# Altium PCB Wikiot-II.PcbDoc (part 2 of 2)
Units mil, origin at the board's own origin, x right, y up, seen from the top; angles counter-clockwise.
Board outline 3930 x 3935 mil, 2 copper layers (Top Layer, Bottom Layer); 209 components, 179 nets, 926 pads, 255 vias.
Unrouted connection lines stored in the file: 39.
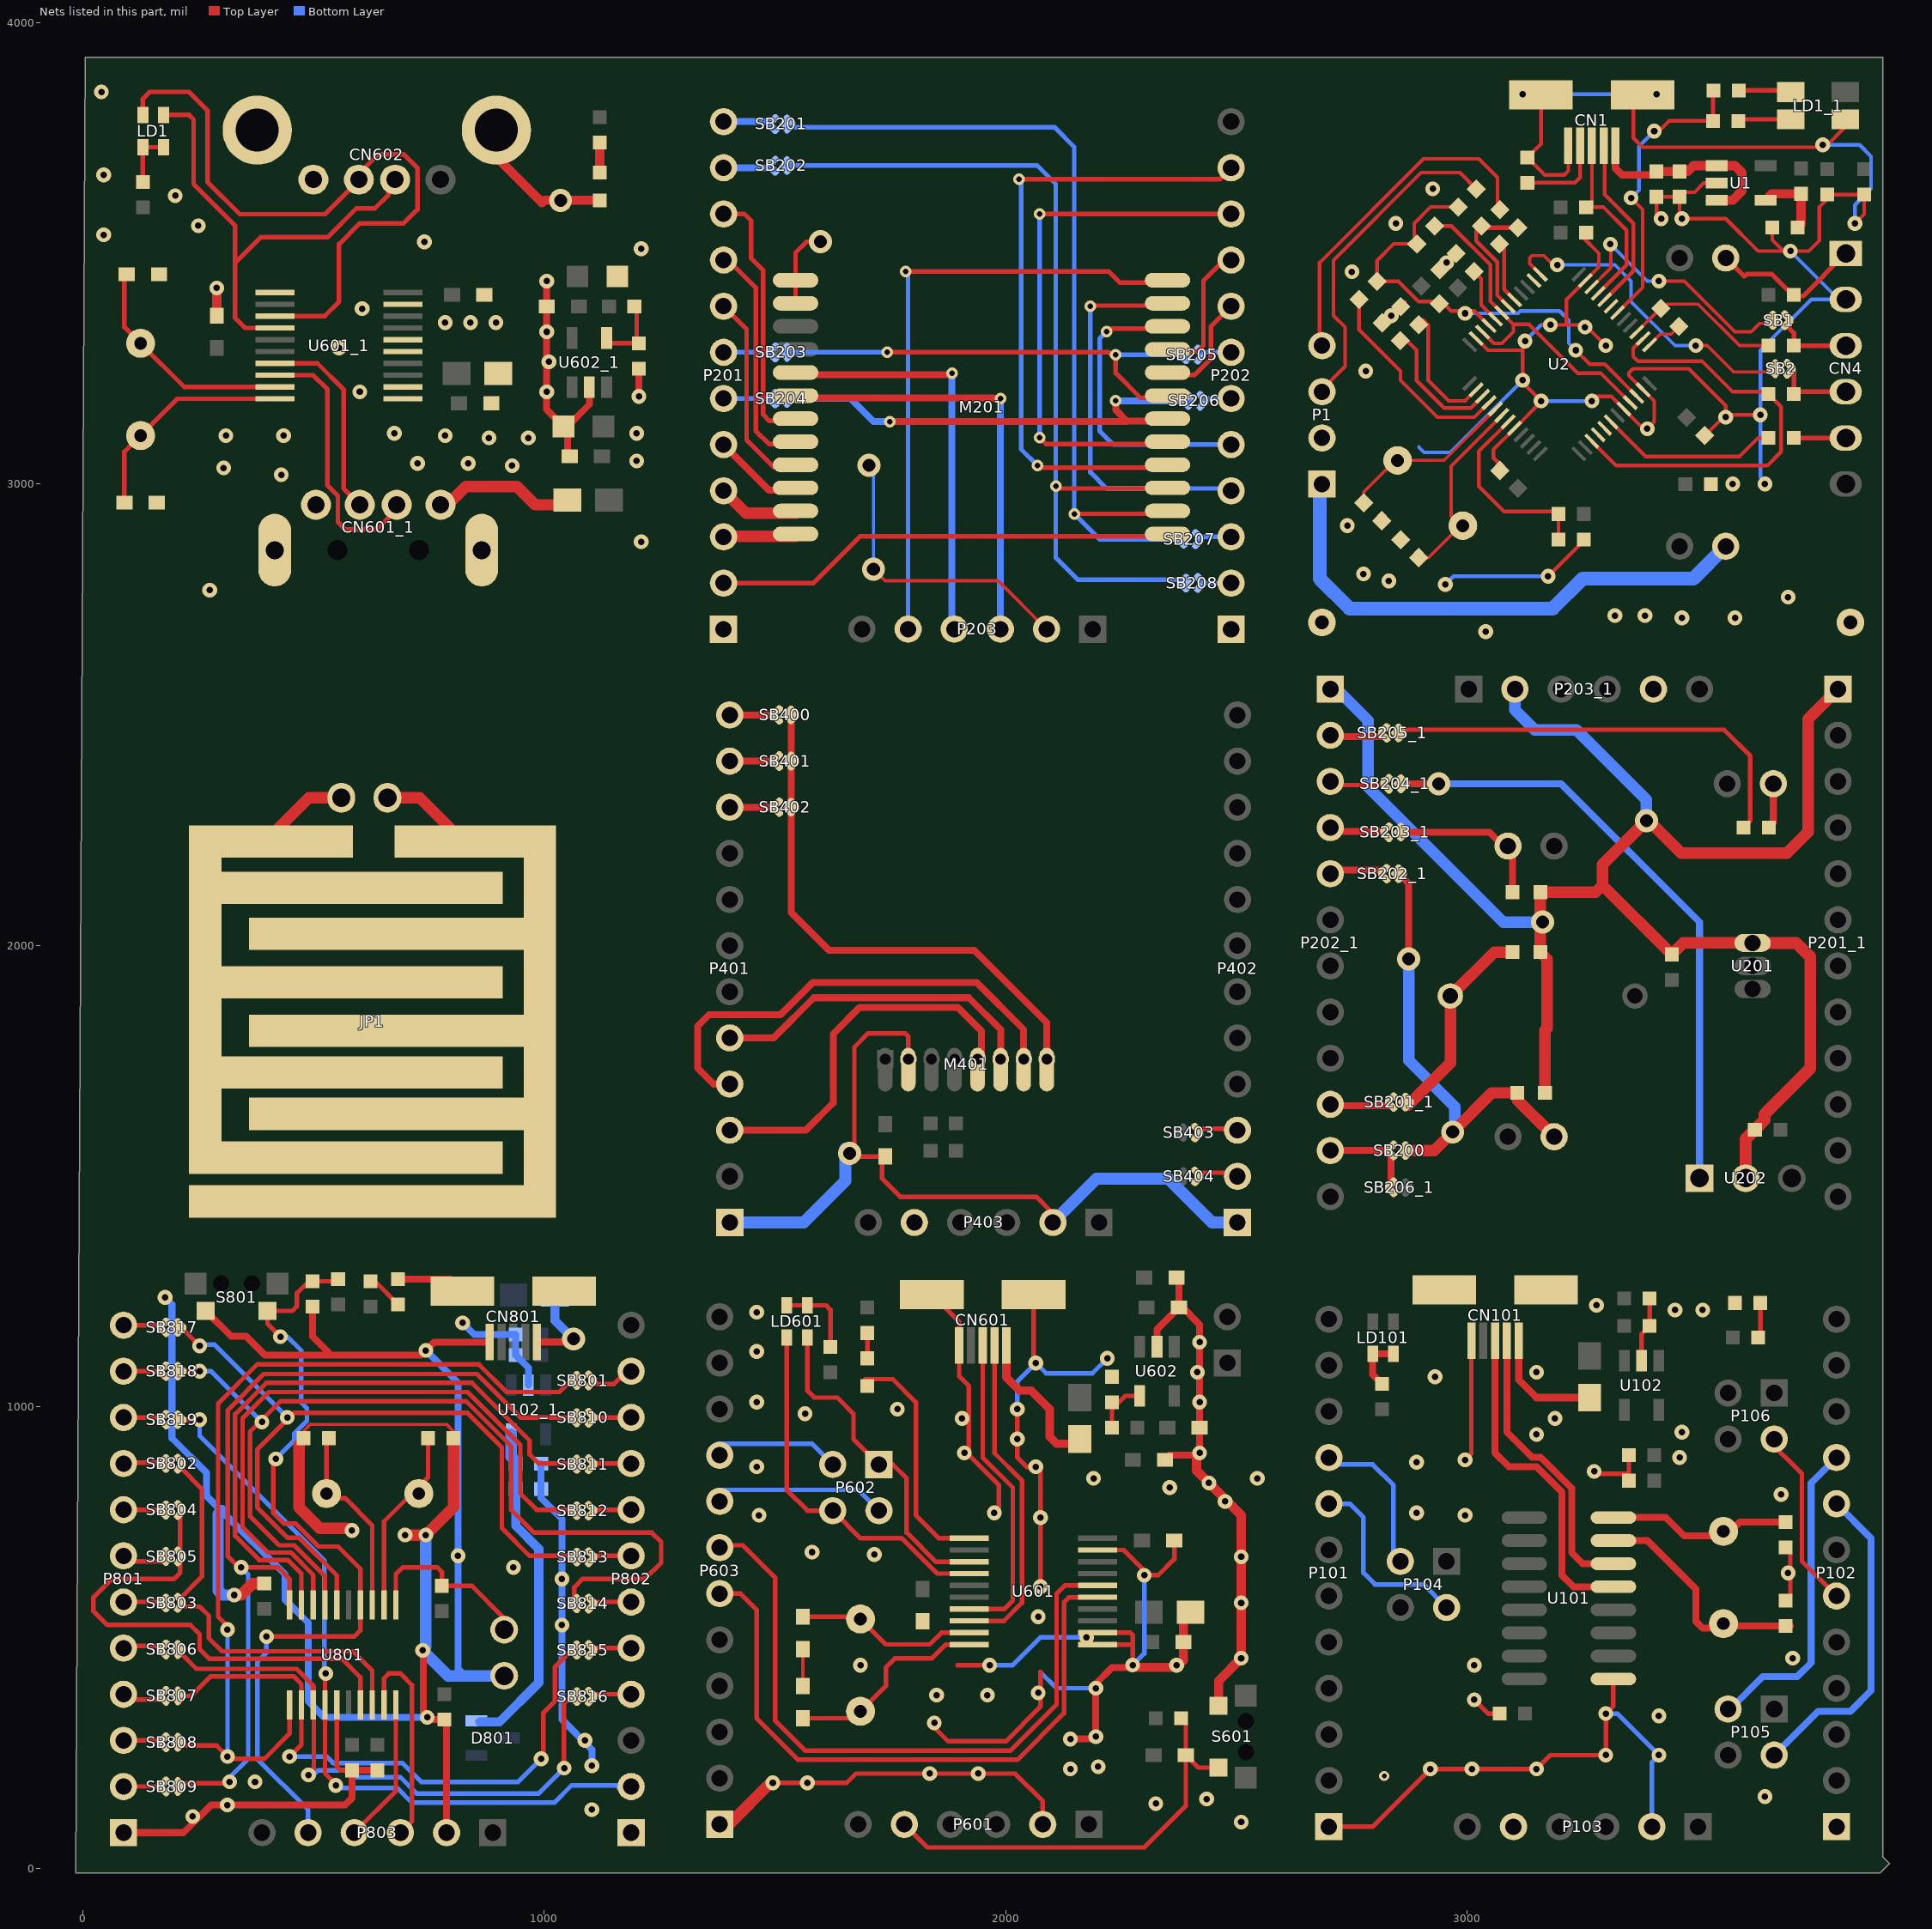
[diagram p2: the nets of this part, all layers, seen from the top]

## Via types
v1: diameter 32, hole 14, Top Layer to Bottom Layer, 220 vias
v2: diameter 50, hole 28, Top Layer to Bottom Layer, 18 vias
v3: diameter 25, hole 12, Top Layer to Bottom Layer, 15 vias
v4: diameter 22, hole 10, Top Layer to Bottom Layer, tented both sides, 1 vias
v5: diameter 32, hole 14, Top Layer to Bottom Layer, tented bottom, 1 vias

## Nets (pads, with @x,y where several pads share a name; then routed paths per layer and width w, separated by ;. In a path a pad name is that pad's centre, name@x,y a point inside that pad or via, vN(x,y) a via of type N, cw(c..) or ccw(c..) an arc to the next point about the centre after c; other vN are vias at no path point) (continued)
GND: C1.1 C2.1 C3.2 C4.1 C5.1 C6.1 C7.1 C8.2 C11.1 C12.1 C13.2 C100.1 C101.1 C102.1 C103.1 C111.1 C112.1 C113.1 C200.1 C201.1 C400.2 C601.1 C601_1.1 C602.2 C602_1.2 C603.1 C603_1.1 C604.1 C604_1.1 C605.1 C605_1.1 C606.1 C606_1.1 C608.1 C608_1.1 C609.1 C609_1.1 C610.1 C610_1.1 C611.1 C611_1.1 C800.1 C801.1 C802.2 C803.2 C804.2 C805.2 C806.2 C807.2 C808.1 C809.1 C810.1 CN1.0 CN1.5 CN4.2 CN101.0 CN101.5 CN601.0 CN601.5 CN601_1.0 CN601_1.4 CN602.0 CN602.4 CN801.0 CN801.5 D106.2 D800.2 JP801.1 LD1_1.1 M201.1 M201.2 M401.2 P1.2 P101.1 P102.1 P103.2 P201.1 P201_1.1 P202.1 P202_1.1 P203.2 P203_1.2 P401.1 P402.1 P403.2 P601.2 P603.1 P801.1 P802.1 P803.2 pad.2 R2.1 R3.1 R6.1 R9.2 R15.2 R29.1 R202.1 R204.1 R205.1 R601_1.1 R605.1 R605_1.1 S601.1 S801.1 U1.2 U2.8 U2.20 U2.23 U2.35 U2.47 U101.1 U102.2 U102_1.2 U201.1 U202.2 U601.11 U601.12 U601.19 U601_1.11 U601_1.12 U601_1.19 U602.2 U602_1.2 U801.15 | length 27097.6
  Top Layer w7: C803.2@478,932 478,947 493,962 788,962 803,947 C802.2@803,932 ; C606.1@1560,400 C605.1@1560,475 C605.1@1560,485 ; v2(1713.17,2815.46) 1738.17,2790.46 1983.17,2790.46 P203.2@2088.17,2685.46
  Top Layer w8: R2.1@2825.55,3354.45 R3.1@2865.55,3394.45 ; R6.1@2975.55,3504.45 R6.1@2980.55,3504.45 ; U2.47@3019.05,3315.68 3044.73,3290 3120,3290 ; C7.1@3070.55,3029.45 3070.55,3042.98 3056.55,3056.98 3056.55,3074.8 U2.8@3102.56,3120.81 3160,3178.24 v1(3160,3180) 3120,3220 v1(3120,3225) 3120,3290 ; v1@3130,3310 v1(3125,3310) 3120,3305 3120,3290 ; CN1.0@3159.7,3843.46 3159.7,3737.2 R15.2@3130,3707.5 3167.5,3670 3210,3670 3218.76,3678.76 CN1.5@3218.76,3733.14 ; v1@3165,3345 v1(3180,3345) 3215,3345 ; v1(3175,2800) 3252.5,2877.5 C6.1@3252.5,2880 ; C1.1@3250,3535 3285,3500 3285,3470.27 U2.35@3255.68,3440.95 3215,3400.27 3215,3345 ; v1(3270,3180) v1@3275,3180 ; v1@3275,3190 3311.76,3190 U2.20@3339.19,3162.56 3381.76,3120 v1(3390,3120) 3405,3135 3405,3180.27 U2.23@3380.95,3204.32 3350,3235.27 3350,3241 3359,3250 3480,3250 3560,3170 v1(3560,3145) ; v1(3300,3300) 3260,3340 v1(3255,3340) 3250,3345 3215,3345 ; CN1.0@3380.17,3843.46 3360,3823.28 3360,3750 3380,3730 3775,3730 3819.06,3774.06 LD1_1.1@3819.06,3790.47 ; v1(3420,3575) 3410,3585 C2.1@3410,3622.5 C5.1@3460,3622.5 3460,3580 v1(3465,3575) 3560,3575 3630,3505 v1@3685,3505 ; C5.1@3460,3632.5 3492.5,3632.5 3512.6,3652.6 U1.2@3540,3652.6 ; C11.1@3514.45,3105.55 3515.55,3105.55 3555,3145 v1(3560,3145) ; v1(3635,3150) 3565,3150 v1(3560,3145) ; R29.1@3661,3556 3661,3529 v1@3685,3505 ; v1@3707.5,3497.5 v1(3700,3505) ; v1(3840,3565) 3860,3585 C13.2@3860,3627.5 ; C13.2@3855,3627.5 3790,3627.5 3762.5,3600 3762.5,3527.5 3740,3505 v1(3700,3505) ; v1@3685,3505 v1(3700,3505)
  Top Layer w10: U801.15@550.2,353.73 550.2,219.8 558,212 C804.2@583,212 ; v1@1490,185 v1(1495,185) v1(1570,185) 1655,185 1675,205 v1(1835,205) v1(1940,205) 2020,205 2080,145 P601.2@2080,95 P601.2@2080,75 ; M201.2@1544.4,3391.76 M201.1@1544.4,3441.76 1544.4,3501.68 1568.17,3525.46 v2(1598.17,3525.46) ; M401.2@1788.72,1730.77 1788.72,1802.65 1781.83,1809.54 1701.83,1809.54 1671.83,1779.54 1671.83,1542.65 C400.2@1738.72,1542.65 1731.83,1535.76 1731.83,1494.54 1771.83,1454.54 2066.83,1454.54 2101.83,1419.54 P403.2@2101.83,1399.54 ; CN601.0@1839.7,1243.46 1898.76,1184.4 CN601.5@1898.76,1133.14 1898.76,1066.24 1920,1045 1920,895 1985,830 1985,770 v1(1975,770) ; v1@1850,325 1845,320 v1(1845,315) 1845,305 1875,275 2000,275 2075,350 2075,425 ; 1895,440 v1(1965,440) ; v1(2025,995) v1(2025,930) 2025,890 2045,870 v1(2065,870) 2075,860 v1(2075,760) v1(2075,610) v1@2075,605 ; CN601.0@2060.17,1243.46 2060.17,1099.83 v1(2065,1095) ; U601.11@2198.94,484.84 2274.84,484.84 ; U601.12@2198.94,510.43 2269.57,510.43 2274.84,505.16 2274.84,484.84 ; U601.19@2198.94,689.57 2255.43,689.57 2310,635 2330,635 2365,670 2365,705 C603.1@2365,710 ; v1(2274.84,440.16) 2274.84,484.84 ; C604.1@2390,490 C602.2@2390,540 ; P101.1@2700,90 2795,90 v1(2920,215) v1(3010,215) v1(3150,215) 3180,245 v1(3300,245) v1(3300,335) 3316.46,351.46 U101.1@3316.46,410 ; v1(2995,885) 3008.76,898.76 CN101.5@3008.76,1143.14 ; v1(3015,365) 3045,335 C111.1@3070,335 ; v1(3275,860) 3280,855 3350,855 C103.1@3350,895 C103.1@3350,905 ; U102.2@3377.6,1100 3377.6,1157.6 C101.1@3395,1175 C100.1@3395,1235 ; C113.1@3700,580 3700,640 C112.1@3700,695
  Top Layer w15: P801.1@88,77 218,77 278,137 v1(313,137) 568,137 583,152 C804.2@583,212 C805.2@638,212 ; S801.1@266.07,1207.94 321.27,1152.75 353.75,1152.75 394.5,1112 538,1112 ; C801.1@498,1217 498,1152 538,1112 ; D800.2@683,1277 796.16,1277 CN801.0@822.7,1250.46 ; v1@738,477 738,332 748,322 C806.2@783,322 788,317 P803.2@788,77 ; CN801.5@881.76,1140.14 761.14,1140.14 v1(743,1122) 733,1112 538,1112 ; v1@1010,3445 v1(1005,3440) C611_1.1@1005,3385 1005,3265 1005,3161.69 C608_1.1@1041.69,3125 ; C609_1.1@1050,3060 1050,3116.69 C608_1.1@1041.69,3125 ; U602_1.2@1097.4,3210 1097.4,3172.4 1050,3125 C608_1.1@1041.69,3125 ; v1(1205,3190) R605_1.1@1205,3250 ; v1@2150,280 2195,280 2195,400 2230,435 v1@2287.87,435 ; U602.2@2327.6,1130 2327.6,1167.6 C608.1@2375,1215 C608.1@2383.31,1215 ; C610.1@2353.31,895 2415,895 v1(2420,900) C611.1@2420,955 2420,1178.31 C608.1@2383.31,1215 ; C609.1@2375,1280 2375,1223.31 C608.1@2383.31,1215
  Top Layer w20: C601_1.1@290,3365 v1(290,3425) ; C602_1.2@880,3240 C602_1.2@895,3255 ; CN602.0@901.6,3757 901.6,3703.4 995,3610 1000,3615 R601_1.1@1120,3615 ; v1@2287.87,435 2370,435 2385,450 C604.1@2385,490 2385,540 C602.2@2400,555 ; v1@2415,895 2413.31,893.31 2413.31,861.69 v1(2440,835) 2510,765 v1(2510,675) v1(2510,575) v1(2510,455) 2460.94,405.94 S601.1@2460.94,351.93
  Top Layer w25: v1(328,592) 343,592 368,617 C807.2@393,617 ; C803.2@468,917 468,782 513,737 v1@573,737 ; v1(698,722) v1(743,722) 803,782 C802.2@803,932 ; P603.1@1380,95 1400,95 v1@1490,185 ; v2(3163.17,2050.46) v2@3158.17,2050.46 ; R205.1@3168.17,1680.46 3168.17,1815.46 3173.17,1820.46 3173.17,1970.46 R202.1@3158.17,1985.46 v2@3158.17,2050.46 ; v2(3388.17,2270.46) 3293.17,2175.46 3293.17,2130.46 ; v2@3388.17,2275.46 3463.17,2200.46 3693.17,2200.46 3738.17,2245.46 3738.17,2490.46 P201_1.1@3803.17,2555.46 ; U201.1@3618.17,2005.46 3468.17,2005.46 C201.1@3443.17,1980.46 3293.17,2130.46 ; v2@3158.17,2050.46 R204.1@3158.17,2115.46 3278.17,2115.46 3293.17,2130.46
  Top Layer w26: U202.2@3603.17,1495.46 3603.17,1580.46 C200.1@3623.17,1600.46 3644.17,1621.46 3644.17,1634.46 3743.17,1733.46 3743.17,1975.46 3713.17,2005.46 U201.1@3618.17,2005.46
  Bottom Layer w7: v2(1703.17,3040.46) 1713.17,3030.46 v2(1713.17,2815.46)
  Bottom Layer w8: 2895,3080 2906.45,3068.55 2963.55,3068.55 v1(3120,3225) ; v1(2952.5,2782.5) 2970,2800 v1(3175,2800) ; v1(3120,3845) v1(3410,3845) ; v1(3125,3310) 3160,3345 v1(3180,3345) ; v1(3160,3180) v1(3270,3180) ; 3635,3015 v1(3635,3150) 3635,3290 3745,3400 CN4.2@3820,3400 3805,3400 v1(3700,3505) ; v1(3770,3735) 3850,3735 3875,3710 3875,3640 3840,3605 v1(3840,3565)
  Bottom Layer w10: v1(1965,440) 2015,440 2075,500 v1(2175,500) ; v1(1975,770) v1@1975,775 ; v1(2025,995) 2025,1055 v1(2065,1095) 2087.5,1072.5 2187.5,1072.5 v1(2220,1105) ; 2075,425 2110,390 v1(2195,390) ; v1(2274.84,440.16) 2300,465.32 v1(2300,635) ; v1(3300,335) 3325,335 v1(3415,245) 3400,230 P103.2@3400,90
  Bottom Layer w15: v1(178,1237) 193,1222 193,932 268,857 268,807 300.5,774.5 438,637 438,582 488,532 488,362 523,327 v1(746.23,327) ; v1(743,1122) 813,1052 813,432 828,417 ; v1(823,1182) 848,1157 C810.1@938,1157 C809.1@938,1112 965.4,1084.6 U102_1.2@965.4,1047 ; C800.1@993,877 C808.1@993,822 993,802 1038,757 1038,322 1103,257 v1(1103,222)
  Bottom Layer w25: 300.5,774.5 293,767 293,602 303,592 v1(328,592) ; v1(743,722) 743,478.77 v1(736.23,472) 791.23,417 828,417 JP801.1@913,417 ; P202_1.1@2703.17,2555.46 2717.17,2555.46 2785.17,2487.46 2785.17,2343.46 3078.17,2050.46 v2(3163.17,2050.46) ; P203_1.2@3103.17,2555.46 3103.17,2510.46 3146.17,2467.46 3236.17,2467.46 3388.17,2315.46 v2(3388.17,2270.46)
  Bottom Layer w26: P401.1@1401.83,1399.54 1561.83,1399.54 1651.83,1489.54 v2@1651.83,1559.54 ; P403.2@2101.83,1399.54 2196.83,1494.54 2351.83,1494.54 2446.83,1399.54 P402.1@2501.83,1399.54
  other v1: 2510,100 238,112 1103,127 2325,140 2435,150 3645,155 373,187 2140,215 2200,220 1088,277 2140,280 2195,285 3415,330 1850,375 1960,375 2070,380 1685,440 2370,440 3015,440 3705,455 1038,527 2070,545 1038,627 3695,640 933,652 813,677 1715,680 1580,685 583,732 1465,765 2995,765 2890,770 2475,795 3680,810 2355,825 2190,845 2545,845 1460,870 2890,880 3460,890 1910,900 3150,940 3465,945 1905,975 3190,975 1565,985 1765,995 1460,1010 2420,1010 2930,1065 2415,1075 3150,1075 1460,1120 2420,1140 1460,1205 3450,1210 3510,1210 3280,1220 3040,2680 3465,2710 3580,2710 3320,2715 3385,2715 3695,2755 275,2770 2830,2790 2775,2805 1210,2875 2740,2910 3575,3000 3645,3000 430,3020 305,3035 930,3040 725,3045 835,3045 1200,3050 880,3100 965,3100 310,3105 435,3105 785,3105 675,3110 1200,3110 600,3200 1005,3200 2780,3245 1010,3265 555,3295 1005,3330 840,3350 895,3350 2835,3365 605,3380 2750,3460 2955,3480 1210,3510 740,3525 45,3540 250,3560 2845,3565 200,3625 2925,3640 45,3670 40,3850
  other v2: 1661.83,1549.54 1035,3615
  other v4: 2820,200
  other v5: 785,3350
INT0: M401.8 SB400.2 SB401.2 SB402.2 | length 1172.7
  Top Layer w15: SB400.2@1534.83,2489.54 SB401.2@1534.83,2399.54 1534.83,2294.54 1534.83,2071.54 1616.83,1989.54 1931.83,1989.54 2088.72,1832.65 M401.8@2088.72,1730.77
IR_CAP: SB204_1.2 U202.1 | length 1324.2
  Top Layer w15: SB204_1.2@2861.17,2357.46 2868.17,2350.46 v2(2938.17,2350.46)
  Bottom Layer w15: v2(2938.17,2350.46) 3203.17,2350.46 3503.17,2050.46 U202.1@3503.17,1495.46
LDR_AD: R201.1 R202.2 SB201_1.2 | length 449.5
  Top Layer w25: SB201_1.2@2871.17,1653.46 2963.17,1745.46 R201.1@2963.17,1890.46 3058.17,1985.46 R202.2@3098.17,1985.46
LED_STLINK: R20.1 R21.1 U2.30 | length 650.4
  Top Layer w8: U2.30@3325.27,3371.36 3380,3426.08 3380,3595 v1(3355,3620) ; v1(3405,3765) 3415,3765 3437,3787 R21.1@3532.5,3787 ; R20.1@3532.5,3852 R20.1@3533.5,3853
  Top Layer w10: R21.1@3532.5,3787 R20.1@3532.5,3852
  Bottom Layer w8: v1(3355,3620) 3372,3637 3372,3732 v1(3405,3765)
MISO: M401.7 P401.4 | length 1049.8
  Top Layer w15: P401.4@1401.83,1699.54 1366.83,1699.54 1331.83,1734.54 1331.83,1824.54 1356.83,1849.54 1511.83,1849.54 1581.83,1919.54 1936.83,1919.54 2038.72,1817.65 M401.7@2038.72,1730.77
MOSI: M401.6 P401.5 | length 738.3
  Top Layer w15: P401.5@1401.83,1799.54 1496.83,1799.54 1583.83,1886.54 1919.83,1886.54 1988.72,1817.65 M401.6@1988.72,1730.77
NACT: R601.1 U601.1 U601_1.1 | length 512.4
  Top Layer w10: 1695,1060 1755,1060 1805,1010 1805,765 1854.84,715.16 U601.1@1921.06,715.16
NetC112_2: C112.2 U101.8 Y100.1 | length 398.4
  Top Layer w15: U101.8@3301.46,760 3430,760 3470,720 Y100.1@3555,720 ; Y100.1@3570,730 3590,750 C112.2@3690,750
NetC113_2: C113.2 U101.7 Y100.2 | length 505.3
  Top Layer w15: U101.7@3301.46,710 3390,710 3495,605 3495,535 3510,520 Y100.2@3555,520 ; Y100.2@3570,530 3575,525 C113.2@3700,525
NetC601_2: 
NetC605_2: C605.2 C605_1.2 U601.9 U601_1.9 Y601.1 Y601_1.1 | length 893.3
  Top Layer w10: C605_1.2@95,3455 90,3450 90,3340 Y601_1.1@125,3305 219.57,3210.43 U601_1.9@416.06,3210.43 ; C605.2@1560,545 1680,545 Y601.1@1685,540 1740,485 1835,485 1860.43,510.43 U601.9@1921.06,510.43
NetC606_2: C606.2 C606_1.2 U601.10 U601_1.10 Y601.2 Y601_1.2 | length 934.3
  Top Layer w10: C606_1.2@90,2960 90,3070 Y601_1.2@125,3105 204.84,3184.84 U601_1.10@416.06,3184.84 ; C606.2@1560,325 1670,325 Y601.2@1685,340 1740,395 1740,435 1760,455 1840,455 1869.84,484.84 U601.10@1921.06,484.84
NetC607_1: C607.1 P601.5 R603.2 S601.2 | length 952.2
  Top Layer w10: P601.5@1780,95 1830,45 2300,45 2390,135 C607.1@2390,245 ; R603.2@2380,330 2385,330 2390,325 C607.1@2390,245 ; S601.2@2460.94,218.07 2416.93,218.07 C607.1@2390,245
NetC701_2: 
NetC702_2: 
NetC703_2: 
NetC800_2: C800.2 C808.2 D801.2 U102_1.5 | length 721.8
  Bottom Layer w20: D801.2@859.97,317 903,317 988,402 988,692 938,742 C808.2@938,822
  Bottom Layer w25: U102_1.5@928,940.7 928,892 938,882 C800.2@938,877 C808.2@938,827
NetC802_1: C802.1 U801.2 X801.1 | length 401.3
  Top Layer w10: U801.2@652.57,570.27 652.57,751.57 748,847 C802.1@748,932
NetC803_1: C803.1 U801.3 X801.2 | length 428.2
  Top Layer w10: C803.1@523,932 528,927 528,802 568,802 626.98,743.02 U801.3@626.98,570.27
NetCN1_4: CN1.4 R15.1 | length 183.7
  Top Layer w8: R15.1@3137.5,3645 3146,3653.5 3233.5,3653.5 3244.35,3664.35 CN1.4@3244.35,3733.14
NetCN4_1: CN4.1 JP2.2 R1.2 | length 336.6
  Top Layer w10: JP2.2@3560,3490 3600,3450 3605,3455 3660,3455 3707.5,3407.5 3727.5,3407.5 CN4.1@3820,3500
NetCN4_3: CN4.3 R5.1 SB1.1 | length 160.5
  Top Layer w10: SB1.1@3693,3342 3707.5,3327.5 R5.1@3707.5,3300 CN4.3@3820,3300
NetCN4_4: CN4.4 R8.1 SB2.1 | length 179.4
  Top Layer w10: SB2.1@3698,3258 3707.5,3248.5 R8.1@3707.5,3200 ; R8.1@3707.5,3195 R8.1@3707.5,3200 ; CN4.4@3820,3200 R8.1@3707.5,3200
NetCN4_5: CN4.5 R13.1 | length 112.5
  Top Layer w10: R13.1@3707.5,3100 CN4.5@3820,3100
NetCN101_1: CN101.1 F101.2 | length 244.2
  Top Layer w16: CN101.1@3111.12,1143.14 3111.12,1058.88 3150,1020 F101.2@3255,1020
NetCN101_2: CN101.2 U101.6 | length 613.7
  Top Layer w15: CN101.2@3085.53,1143.14 3085.53,945.47 3140,891 3158.7,891 3226,823.7 3226,684 3250,660 U101.6@3301.46,660
NetCN101_3: CN101.3 U101.5 | length 710.2
  Top Layer w15: CN101.3@3059.94,1143.14 3059.94,900.06 3090,870 3150,870 3205,815 3205,635 3230,610 U101.5@3301.46,610
NetCN601_1: CN601.1 CN601_1.1 F601.2 F601_1.2 | length 639.3
  Top Layer w18: CN601.1@2001.12,1133.14 2001.12,1063.88 2030,1035 2055,1035 2095,995 2095,935 2110,920 2150,920 F601.2@2160,930
  Top Layer w25: CN601_1.1@775,2955 790,2955 830,2995 940,2995 980,2955 1040,2955 F601_1.2@1050,2965
NetCN601_2: CN601.2 CN601_1.2 U601.8 U601_1.8 | length 1298.8
  Top Layer w10: U601_1.8@416.06,3236.02 498.98,3236.02 530,3205 530,2997.18 552.5,2974.68 552.5,2917.5 568.75,2901.25 636.25,2901.25 680,2945 CN601_1.2@680,2955 ; U601.8@1921.06,536.02 1996.02,536.02 2035,575 2035,840 1975.53,899.47 CN601.2@1975.53,1133.14
NetCN601_3: CN601.3 CN601_1.3 U601.7 U601_1.7 | length 1118.5
  Top Layer w10: U601_1.7@416.06,3261.61 508.39,3261.61 565,3205 565,2990.46 600,2955.46 CN601_1.3@600,2955 ; U601.7@1921.06,561.61 1996.61,561.61 2015,580 2015,825 1949.94,890.06 CN601.3@1949.94,1133.14
NetCN801_1: CN801.1 F801.2 | length 213.3
  Top Layer w16: CN801.1@984.12,1140.14 1066.14,1140.14 1073,1147 v2(1063,1147)
  Bottom Layer w20: F801.2@1023,1242 1023,1187 v2(1063,1147)
NetD106_1: D106.1 R101.1 | length 77.1
  Top Layer w10: R101.1@3630,1150 3635,1155 D106.1@3635,1225
NetD601_2: D601.2 D601_1.2 R601.2 R601_1.2 | length 120
  Top Layer w10: R601.2@1700,1105 D601.2@1700,1160
  Top Layer w20: R601_1.2@1120,3675 D601_1.2@1120,3740
NetD702_2: 
NetD800_1: D800.1 R800.1 | length 80.7
  Top Layer w10: R800.1@623,1272 633,1272 D800.1@683,1222
NetJP1_1: JP1.1 P1_1.2 | length 198
  Top Layer w25: JP1.1@410,2225 410,2240 490,2320 P1_1.2@559.9,2320
NetJP1_2: JP1.2 P1_1.1 | length 229.4
  Top Layer w25: P1_1.1@660,2320 730,2320 825,2225 JP1.2@850,2225
NetJP3_2: JP3.2 P1.1 | length 1167.8
  Bottom Layer w30: P1.1@2680,3000 2680,2795 2745,2730 3185,2730 3250,2795 3490,2795 JP3.2@3560,2865
NetJP4_2: 
NetJP801_2: JP801.2 R801.2 U801.1 | length 406
  Top Layer w10: U801.1@678.16,570.27 678.16,637.16 693,652 768,652 778,642 R801.2@778,612 843,612 913,542 JP801.2@913,507
NetLD1_2: LD1_1.2 R21.2 | length 110
  Top Layer w10: R21.2@3590.97,3790.47 LD1_1.2@3700.94,3790.47
NetLD1_3: LD1.3 LD1.4 LD1_1.3 R20.2 R602_1.2 | length 229
  Top Layer w10: R602_1.2@130,3655 LD1.4@130,3730 LD1.3@175,3730 ; R20.2@3588.5,3853 LD1_1.3@3697.47,3853
NetLD101_3: LD101.3 LD101.4 R102.2 | length 118.3
  Top Layer w15: R102.2@2815,1050 2795,1070 LD101.4@2795,1115 LD101.3@2840,1115
NetLD200_2: LD200.2 R200.1 | length 99.1
  Top Layer w15: R200.1@3653.17,2255.46 3663.17,2265.46 LD200.2@3663.17,2350.46
NetLD601_3: LD601.3 LD601.4 R602.2 | length 179.1
  Top Layer w10: LD601.3@1525,1220 LD601.4@1570,1220 1610,1220 1620,1210 R602.2@1620,1130
NetM401_3: 
NetP1_3: P1.3 R18.2 | length 721
  Top Layer w8: P1.3@2680,3200 2735,3255 2735,3340 2710,3365 2710,3485 2900,3675 2983.89,3675 R18.2@3019.45,3639.45
NetP1_4: P1.4 R22.2 | length 750.6
  Top Layer w8: P1.4@2680,3300 2680,3480 2905,3705 3025,3705 3065.55,3664.45 R22.2@3065.55,3589.45
NetP201_6: P201.6 SB204.1 | length 110.3
  Bottom Layer w10: P201.6@1388.17,3185.46 1487.17,3185.46 SB204.1@1495.17,3177.46
NetP201_7: P201.7 SB203.1 | length 110.3
  Bottom Layer w10: P201.7@1388.17,3285.46 1487.17,3285.46 SB203.1@1495.17,3277.46
NetP201_11: P201.11 SB202.1 | length 108.2
  Bottom Layer w15: P201.11@1388.17,3685.46 1492.17,3685.46 SB202.1@1495.17,3682.46
NetP201_12: P201.12 SB201.1 | length 112.4
  Bottom Layer w15: P201.12@1388.17,3785.46 1482.17,3785.46 SB201.1@1495.17,3772.46
NetP202_2: P202.2 P202_1.2 SB205_1.1 SB208.1 | length 188.6
  Top Layer w15: P202_1.2@2703.17,2455.46 2706.17,2452.46 SB205_1.1@2820.17,2452.46
  Bottom Layer w10: SB208.1@2421.17,2793.46 2429.17,2785.46 P202.2@2488.17,2785.46
NetP202_3: P202.3 P202_1.3 SB204_1.1 SB207.1 | length 192.7
  Top Layer w10: P202_1.3@2703.17,2355.46 2711.17,2347.46 SB204_1.1@2815.17,2347.46
  Bottom Layer w10: SB207.1@2416.17,2872.46 2429.17,2885.46 P202.3@2488.17,2885.46
NetP202_4: P202_1.4 SB203_1.1 | length 115.3
  Top Layer w15: P202_1.4@2703.17,2255.46 2711.17,2247.46 SB203_1.1@2815.17,2247.46
NetP202_5: P202_1.5 SB202_1.1 | length 120.3
  Top Layer w15: P202_1.5@2703.17,2155.46 2711.17,2163.46 SB202_1.1@2820.17,2163.46
NetP202_6: P202.6 SB206.1 | length 63.2
  Bottom Layer w10: SB206.1@2426.17,3188.46 2429.17,3185.46 P202.6@2488.17,3185.46
NetP202_7: P202.7 SB205.1 | length 68.2
  Bottom Layer w10: SB205.1@2421.17,3288.46 2424.17,3285.46 P202.7@2488.17,3285.46
NetP202_10: P202_1.10 SB201_1.1 | length 133.2
  Top Layer w15: P202_1.10@2703.17,1655.46 2706.17,1652.46 SB201_1.1@2835.17,1652.46
NetP202_11: P202_1.11 SB200.1 SB206_1.1 | length 216
  Top Layer w15: P202_1.11@2703.17,1555.46 2827.17,1555.46 SB200.1@2835.17,1547.46 2834.29,1546.57 2834.29,1468.34 SB206_1.1@2835.17,1467.46
NetP401_10: P401.10 SB402.1 | length 99
  Top Layer w15: P401.10@1401.83,2299.54 SB402.1@1500.83,2299.54
NetP401_11: P401.11 SB401.1 | length 105.3
  Top Layer w15: P401.11@1401.83,2399.54 1495.83,2399.54 SB401.1@1503.83,2407.54
NetP401_12: P401.12 SB400.1 | length 95
  Top Layer w15: P401.12@1401.83,2499.54 SB400.1@1496.83,2499.54
NetP402_2: P402.2 SB404.1 | length 90.3
  Top Layer w10: SB404.1@2414.83,1507.54 2493.83,1507.54 P402.2@2501.83,1499.54
NetP402_3: P402.3 SB403.1 | length 88.2
  Top Layer w10: SB403.1@2414.83,1602.54 2498.83,1602.54 P402.3@2501.83,1599.54
NetP701_6: 
NetP701_7: 
NetP701_10: 
NetP701_11: 
NetP701_12: 
NetP801_2: P801.2 SB809.1 | length 90.3
  Top Layer w10: P801.2@88,177 167,177 SB809.1@175,169
NetP801_3: P801.3 SB808.1 | length 92.1
  Top Layer w10: P801.3@88,277 162.68,277 SB808.1@175,264.68
NetP801_4: P801.4 SB807.1 | length 91.8
  Top Layer w10: P801.4@88,377 99.65,365.35 SB807.1@175,365.35
NetP801_5: P801.5 SB806.1 | length 89.1
  Top Layer w10: P801.5@88,477 93.03,482.03 SB806.1@175,482.03
NetP801_10: P801.10 SB819.1 | length 92.4
  Top Layer w10: P801.10@88,977 162,977 SB819.1@175,964
NetP801_11: P801.11 SB818.1 | length 92.4
  Top Layer w10: P801.11@88,1077 162,1077 SB818.1@175,1064
NetP801_12: P801.12 SB817.1 | length 88.2
  Top Layer w10: P801.12@88,1177 172,1177 SB817.1@175,1180
NetP802_4: P802.4 SB816.1 | length 88.2
  Top Layer w10: SB816.1@1101,380 1104,377 P802.4@1188,377
NetP802_5: P802.5 SB815.1 | length 88.5
  Top Layer w10: SB815.1@1101,480.71 1104.71,477 P802.5@1188,477
NetP802_6: P802.6 SB814.1 | length 91.8
  Top Layer w10: SB814.1@1101,565.43 1112.57,577 P802.6@1188,577
NetP802_7: P802.7 SB813.1 | length 89.1
  Top Layer w10: SB813.1@1101,682.14 1106.14,677 P802.7@1188,677
NetP802_8: P802.8 SB812.1 | length 89.4
  Top Layer w10: SB812.1@1101,782.86 1106.86,777 P802.8@1188,777
NetP802_9: P802.9 SB811.1 | length 89.7
  Top Layer w10: SB811.1@1101,883.57 1107.57,877 P802.9@1188,877
NetP802_10: P802.10 SB810.1 | length 90.6
  Top Layer w10: SB810.1@1101,968.29 1109.71,977 P802.10@1188,977
NetP802_11: P802.11 SB801.1 | length 88.6
  Top Layer w10: SB801.1@1101,1049 1150,1049 P802.11@1178,1077
NetR2_2: R2.2 U2.3 | length 279.7
  Top Layer w8: R2.2@2864.45,3315.55 2890,3290 2890,3224.54 2949.54,3165 3007.56,3165 U2.3@3032.97,3190.4
NetR3_2: R3.2 U2.2 | length 267.5
  Top Layer w8: R3.2@2904.45,3355.55 2915,3345 2915,3225 2959.77,3180.23 2994.95,3180.23 U2.2@3019.05,3204.32
NetR6_2: R6.2 U2.44 | length 122.3
  Top Layer w8: R6.2@3014.45,3460.55 3030,3445 3030,3388.24 U2.44@3060.81,3357.44
NetR10_2: 
NetR16_2: 
NetR28_2: R28.2 R29.2 U1.4 | length 158.3
  Top Layer w20: U1.4@3646.3,3615.2 3660.1,3629 R28.2@3723,3629 3723,3563 R29.2@3716,3556
NetR604_2: R604.2 R604_1.2 R605.2 R605_1.2 U602.4 U602_1.4 | length 269
  Top Layer w10: U602_1.4@1134.8,3316.3 1146.1,3305 R605_1.2@1205,3305 1200,3310 R604_1.2@1200,3385 ; R604.2@2230,955 2230,995 2258.7,1023.7 U602.4@2290.2,1023.7
NetU701_3: 
NRST: C801.2 M201.24 P103.5 P203.5 P203_1.5 P403.5 P803.5 R802.1 S801.2 U801.4 | length 3113.9
  Top Layer w10: v1(398,502) 588,502 601.39,515.39 U801.4@601.39,570.27 601.39,648.61 553,697 510.63,697 460.63,747 435.63,747 412.57,770.06 412.57,887 v1(418,887) ; v1(428,1152) 399.93,1180.07 S801.2@399.93,1207.94 453.94,1207.94 463.69,1217.69 463.69,1246.31 488,1270.62 C801.2@488,1272 ; C801.2@498,1272 543,1272 R802.1@548,1267 ; v3(1783.17,3460.46) 2223.17,3460.46 2246.87,3436.76 M201.24@2350.26,3436.76
  Bottom Layer w10: v1(398,502) 398,467 378,447 378,237 488,127 P803.5@488,77 ; v1(418,887) 458,927 458,942 485.5,969.5 485.5,997 473,1009.5 473,1122 443,1152 v1(428,1152) ; v3(1783.17,3460.46) 1788.17,3455.46 P203.5@1788.17,2685.46
OSC_IN: C3.1 U2.5 X1.2 | length 383.1
  Top Layer w7: C3.1@2775.55,2959.45 2775.55,2982.89 2843.97,3051.3 2949.55,3051.3 U2.5@3060.81,3162.56
OSC_OUT: C8.1 U2.6 X1.1 | length 412.3
  Top Layer w7: C8.1@2894.45,2840.55 2916.07,2840.55 2985.4,2909.88 2965,2930.28 2965,3038.92 U2.6@3074.73,3148.64
P0.0/AIN0: M201.23 P202.4 | length 859.2
  Top Layer w10: v3(2183.17,3385.46) 2178.17,3385.46 2179.47,3386.76 M201.23@2350.26,3386.76
  Bottom Layer w10: v3(2183.17,3385.46) 2183.17,3025.46 2218.17,2990.46 2483.17,2990.46 P202.4@2488.17,2985.46
P0.1/AIN1: M201.22 P202.5 | length 653.3
  Top Layer w10: v3(2218.17,3330.46) 2224.47,3336.76 M201.22@2350.26,3336.76
  Bottom Layer w10: v3(2218.17,3330.46) 2203.17,3315.46 2203.17,3115.46 2233.17,3085.46 P202.5@2488.17,3085.46
P0.2/AIN2/RX1: M201.21 P202.9 | length 302.2
  Top Layer w10: M201.21@2350.26,3286.76 2414.47,3286.76 2428.17,3300.46 2428.17,3440.46 2473.17,3485.46 P202.9@2488.17,3485.46
P0.3/AIN3/TX1: M201.20 P202.8 | length 240.5
  Top Layer w10: M201.20@2350.26,3236.76 2409.47,3236.76 2443.17,3270.46 2443.17,3292.83 2444.17,3293.83 2444.17,3341.46 P202.8@2488.17,3385.46
P0.4/AIN4/CTS1: M201.19 SB203.2 SB205.2 | length 1036.6
  Top Layer w10: v3(1743.17,3285.46) 2223.17,3285.46 2238.17,3270.46 2238.17,3240.46 2291.87,3186.76 M201.19@2350.26,3186.76
  Bottom Layer w10: SB203.2@1526.17,3285.46 1738.17,3285.46 v3@1743.17,3290.46 ; v3(2238.17,3280.46) SB205.2@2390.17,3280.46
P0.5/AIN5/RTS1: M201.18 SB204.2 SB206.2 | length 1055.9
  Top Layer w15: v3(1748.17,3135.46) 2260.58,3135.46 2261.87,3136.76 ; v3(2238.17,3180.46) 2238.17,3160.46 2261.87,3136.76 ; M201.18@2350.26,3136.76 2261.87,3136.76
  Bottom Layer w15: SB204.2@1526.17,3185.46 1663.17,3185.46 1713.17,3135.46 v3(1748.17,3135.46) ; v3(2238.17,3180.46) SB206.2@2395.17,3180.46
P0.6/AIN6: M201.17 P202.10 | length 1182.8
  Top Layer w10: v3(2073.17,3100.46) 2086.87,3086.76 M201.17@2350.26,3086.76 ; v3(2073.17,3585.46) P202.10@2488.17,3585.46
  Bottom Layer w10: v3(2073.17,3100.46) v3(2073.17,3585.46)
P0.7/AIN7: M201.16 P202.11 | length 1391.6
  Top Layer w10: v3(2028.17,3660.46) 2463.17,3660.46 P202.11@2488.17,3685.46 ; v3(2068.17,3040.46) 2073.17,3035.46 2348.96,3035.46 M201.16@2350.26,3036.76
  Bottom Layer w10: v3(2028.17,3660.46) 2033.17,3655.46 2033.17,3075.46 v3(2068.17,3040.46)
P1.0/T0: M201.15 SB202.2 SB208.2 | length 1951.1
  Top Layer w10: v3(2108.17,2995.46) 2113.17,2990.46 2346.56,2990.46 M201.15@2350.26,2986.76
  Bottom Layer w10: SB202.2@1526.17,3690.46 2068.17,3690.46 2108.17,3650.46 v3(2108.17,2995.46) 2108.17,2840.46 2156.17,2792.46 SB208.2@2385.17,2792.46
P1.1/T1: M201.14 SB201.2 SB207.2 | length 1892.2
  Top Layer w10: v3(2148.17,2935.46) 2348.96,2935.46 M201.14@2350.26,2936.76
  Bottom Layer w10: SB201.2@1531.17,3773.46 2105.17,3773.46 2148.17,3730.46 v3(2148.17,2935.46) 2203.17,2880.46 SB207.2@2385.17,2880.46
P1.2/SS: M201.13 P201.2 | length 1004
  Top Layer w10: P201.2@1388.17,2785.46 1583.17,2785.46 1684.47,2886.76 M201.13@2350.26,2886.76
P1.3/SCK: M201.12 P201.3 | length 156.8
  Top Layer w25: P201.3@1388.17,2885.46 1389.47,2886.76 M201.12@1544.4,2886.76
P1.4/MISO: M201.11 P201.4 | length 176.4
  Top Layer w25: P201.4@1388.17,2985.46 1436.87,2936.76 M201.11@1544.4,2936.76
P1.5/MOSI: M201.10 P201.5 | length 197.1
  Top Layer w15: P201.5@1388.17,3085.46 1486.87,2986.76 M201.10@1544.4,2986.76
P1.6/TX0: M201.9 P201.8 | length 441.3
  Top Layer w10: P201.8@1388.17,3385.46 1438.17,3335.46 1438.17,3095.46 1496.87,3036.76 M201.9@1544.4,3036.76
P1.7/RX0: M201.8 P201.9 | length 503
  Top Layer w10: P201.9@1388.17,3485.46 1398.17,3485.46 1458.17,3425.46 1458.17,3115.46 1486.87,3086.76 M201.8@1544.4,3086.76
P2.0: M201.7 P201.10 | length 551.6
  Top Layer w10: P201.10@1388.17,3585.46 1433.17,3585.46 1448.17,3570.46 1448.17,3489.08 1474.17,3463.08 1474.17,3150.46 1487.87,3136.76 M201.7@1523.11,3136.76
P2.1/DD: M201.6 P203.3 | length 944.3
  Top Layer w15: M201.6@1544.4,3186.76 1971.87,3186.76 1973.17,3185.46 v3(1988.17,3185.46)
  Bottom Layer w15: P203.3@1988.17,2685.46 v3(1988.17,3185.46)
P2.2/DC: M201.5 P203.4 | length 897.4
  Top Layer w15: M201.5@1544.4,3236.76 1879.47,3236.76 v3(1883.17,3240.46)
  Bottom Layer w15: v3(1883.17,3240.46) 1883.17,2690.46 P203.4@1888.17,2685.46
PA0/CTS1: SB813.2 SB817.2 U801.6 | length 1689.8
  Top Layer w10: SB817.2@211,1165 220,1165 v1(253,1132) ; U801.6@550.2,570.27 550.2,634.8 469,716 444,716 378,782 378,907 458,987 833,987 908,912 908,737 968,677 1055.14,677 SB813.2@1065,667.14
  Bottom Layer w10: v1(253,1132) 255.5,1134.5 285.5,1134.5 v1(443,977)
PA1/RTS1: SB814.2 SB818.2 U801.7 | length 2098.4
  Top Layer w10: SB818.2@206,1077 v1(253,1077) ; U801.7@524.61,570.27 524.61,632.76 457.37,700 425,700 362,763 362,946 428,1012 830.63,1012 928,914.63 928,777 978,727 1233,727 1253,707 1253,662 1218,627 1083,627 1065,609 SB814.2@1065,580.43
  Bottom Layer w10: v1(253,1077) 278,1077 v1(388,967)
PA2/TX1: SB812.2 U801.8 | length 1410.9
  Top Layer w10: U801.8@499.02,570.27 499.02,635.72 450.75,684 401,684 346,739 346,975 403,1032 833.25,1032 948,917.25 948,812 983,777 1055.86,777 SB812.2@1065,767.86
PA3/RX1: SB811.2 U801.9 | length 1368.4
  Top Layer w10: U801.9@473.43,570.27 473.43,638.68 444.12,668 382,668 330,720 330,984 398,1052 843,1052 968,927 968,897 988,877 1068.57,877 SB811.2@1070,875.57
PA4/SS: SB809.2 SB810.2 U801.10 | length 1958.6
  Top Layer w10: SB809.2@211,184 315,184 v1(318,187) ; U801.10@447.84,570.27 447.84,627.16 423,652 v1(343,652) 338,652 314,676 314,993 392,1071 854,1071 948,977 1069.29,977 SB810.2@1070,976.29
  Bottom Layer w10: v1(318,187) 318,197 358,237 358,637 ; v1(343,652) 358,637 ; v1@353,642 358,637
PA5/SCK: SB801.2 SB808.2 U801.11 | length 1947.2
  Top Layer w10: SB808.2@211,265.68 289.76,265.68 v1(313.43,242) ; v1@317,521 293,545 293,1007 378,1092 858,1092 918,1032 1033,1032 1051.5,1050.5 1064.5,1050.5 SB801.2@1065,1050 ; v1@318.68,232.68 323,237 393,237 447.84,291.84 U801.11@447.84,353.73 ; SB801.2@1064,1063 SB801.2@1065,1064 SB801.2@1070,1069
  Bottom Layer w10: v1(313.43,242) v1(313.43,517)
PA6/MISO: SB807.2 SB815.2 U801.12 | length 1323.3
  Top Layer w10: SB807.2@203,377 SB807.2@218,377 ; SB807.2@206,373.35 234.35,373.35 277,416 456.37,416 473.43,398.94 U801.12@473.43,353.73 473.43,267.43 v1(448,242) ; v1@998,237 998,337 1023,362 1023,436.29 SB815.2@1058.71,472
  Bottom Layer w10: v1(448,242) 528,242 542,228 692,228 733,187 943,187 v1(993,237)
PA7/MOSI: SB806.2 SB816.2 U801.13 | length 1336.8
  Top Layer w10: SB806.2@215.97,472 SB806.2@211,467.03 246.03,432 463,432 499.02,395.98 U801.13@499.02,353.73 U801.13@500.43,352.32 ; v1(489,202) 500.43,213.43 U801.13@500.43,352.32 ; 500.43,392.32 U801.13@500.43,352.32 ; v1@1042.43,217 1042.43,356.43 SB816.2@1065,379
  Bottom Layer w10: v1(489,202) 500,202 510,212 567,212 582,197 688,197 723,162 988,162 v1(1043,217)
PA9/SCL1/TX1: SB804.1 SB805.1 U801.17 | length 1085.7
  Top Layer w10: SB805.1@211,664 211,640 198,627 63,627 23,587 23,557 53,527 233,527 253,507 253,474.37 273.37,454 561,454 601.39,413.61 U801.17@601.39,353.73 ; SB805.1@211,680 SB804.1@211,785
PA10/SDA1/RX1: SB802.1 SB803.1 U801.18 | length 899.7
  Top Layer w10: SB803.1@210.74,566.97 253.03,566.97 273,547 273,498 301,470 585,470 626.98,428.02 U801.18@626.98,353.73 ; SB803.1@211,585 258,632 258,822 SB802.1@211,869
PB1/TIM3_CH4: P802.2 SB819.2 U801.14 | length 1661.2
  Top Layer w10: SB819.2@206,972 v1(253,972) v1@258,972 ; v1(526.23,422) 524.61,423.61 U801.14@524.61,353.73 524.61,205.39 v1@549.25,180.75 ; v1@548,177 v1(548,179.5)
  Bottom Layer w10: v1(253,972) 253,937 523,667 v1@523,417 ; v1(548,179.5) 553.5,174 681,174 713,142 1021.62,142 1059.12,179.5 1155.5,179.5 1173,162 P802.2@1188,177
PRS_AD: R203.1 R204.2 SB203_1.2 | length 348.6
  Top Layer w15: SB203_1.2@2856.17,2245.46 3048.17,2245.46 3078.17,2215.46 R203.1@3088.17,2215.46 3098.17,2205.46 R204.2@3098.17,2115.46
PWM0/IR: R200.2 SB205_1.2 | length 941.8
  Top Layer w10: SB205_1.2@2856.17,2467.46 3556.17,2467.46 3613.17,2410.46 3613.17,2270.46 R200.2@3598.17,2255.46
RTS1: P102.6 P106.2 | length 402.1
  Top Layer w10: P106.2@3650,930 3725,855 3725,665 P102.6@3800,590
RX0: P101.9 P104.3 P602.3 P603.9 | length 604.7
  Bottom Layer w10: P603.9@1375,920 1580,920 P602.3@1625,875 ; P101.9@2700,890 2715,875 2795,875 2840,830 2840,680 P104.3@2855,665
RX1: P102.9 P105.3 P801.9 SB802.2 | length 777
  Top Layer w10: P801.9@88,877 90,879 SB802.2@175,879
  Bottom Layer w15: P105.3@3565,345 3570,345 3640,415 3715,415 3745,445 3745,835 P102.9@3800,890
RXD: CN602.3 LD1.1 LD601.1 P602.1 U601.3 U601_1.3 | length 2205.1
  Top Layer w10: LD1.1@130,3800 130,3835 145,3850 230,3850 270,3810 270,3655 340,3585 525,3585 583.6,3643.6 583.6,3666.34 591.66,3666.34 640,3714.68 640,3715 695,3715 725,3685 725,3595 695,3565 600,3565 555,3520 555,3395 523.98,3363.98 U601_1.3@416.06,3363.98 ; LD601.1@1570,1150 1570,1035 1585,1020 1635,1020 1670,985 1670,930 P602.1@1725,875 1755,875 1785,845 1785,727.63 1848.65,663.98 U601.3@1921.06,663.98
SCK: M401.5 P401.3 | length 851.1
  Top Layer w15: P401.3@1401.83,1599.54 1566.83,1599.54 1625.83,1658.54 1625.83,1808.24 1683.13,1865.54 1895.83,1865.54 1946.83,1814.54 1946.83,1738.88 M401.5@1938.72,1730.77
SCL: P603.7 U601.16 U601_1.16 | length 1485.7
  Top Layer w10: P603.7@1380,695 1400,695 1395,700 1430,700 1500,630 1500,320 1565,255 2010,255 2110,355 2110,595 2127.8,612.8 U601.16@2198.94,612.8
SCL1: P801.7 SB805.2 | length 92
  Top Layer w10: P801.7@88,677 100,665 SB805.2@175,665
SDA: P603.6 U601.15 U601_1.15 | length 1392.2
  Top Layer w10: P603.6@1380,595 1425,595 1460,560 1460,325 1550,235 2025,235 2126,336 2126,576 2137.2,587.2 U601.15@2198.94,587.2
SDA1: P801.6 SB803.2 | length 92
  Top Layer w10: P801.6@88,577 SB803.2@180,577
STLINK_RX: 
STLINK_TX: 
STM_JTCK: SB2.2 U2.37 | length 704.6
  Top Layer w7: U2.37@3158.24,3454.87 3135,3478.11 3135,3490 3140,3495 3165.91,3495 3185.91,3475 v1(3195,3475) ; v1(3495,3300) 3520,3300 3577,3243 SB2.2@3662,3243
  Bottom Layer w7: v1(3195,3475) 3320,3475 3355,3440 3355,3395 3450,3300 v1(3495,3300)
STM_JTMS: SB1.2 U2.34 | length 549.9
  Top Layer w7: U2.34@3269.6,3427.03 3311,3468.44 3311,3511 v1@3315,3515 ; v1@3405,3440 v1(3415,3440) 3470,3440 3580,3330 3615,3330 3628,3343 3633,3348 SB1.2@3657,3348
  Bottom Layer w7: v1(3310,3520) 3390,3440 v1(3415,3440)
STM_RST: C6.2 R14.1 U2.7 | length 420.5
  Top Layer w8: U2.7@3088.64,3134.73 3025,3071.08 3025,2995 3079.22,2940.78 3186.72,2940.78 3197.5,2930 C6.2@3197.5,2875
SWCLK: P803.4 U801.20 | length 337.3
  Top Layer w10: P803.4@588,77 678.16,167.16 U801.20@678.16,377
SWDIO: P803.3 U801.19 | length 463.3
  Top Layer w10: U801.19@652.57,353.73 652.57,411.57 663,422 688,422 713,397 713,102 P803.3@688,77
SWIM: R4.1 R7.1 R17.2 R18.1 U2.22 U2.45 | length 1063.2
  Top Layer w8: R7.1@2939.45,3390.55 2949.45,3390.55 2965,3375 3015,3375 3015.2,3375.2 U2.45@3046.89,3343.52 ; R7.1@2939.45,3395.55 2894.45,3395.55 2850.55,3439.45 R4.1@2804.45,3439.45 2804.45,3484.45 2840.55,3520.55 R17.2@2890.55,3520.55 2885,3526.11 2885,3565 2920.55,3600.55 R18.1@2980.55,3600.55 ; v1(3235,3290) 3265,3260 3297.44,3260 U2.22@3367.03,3190.4
  Bottom Layer w8: v1(2995,3370) 3110,3370 3115,3375 3200,3375 3220,3355 3220,3305 v1(3235,3290)
SWIM_IN: R17.1 U2.21 U2.43 U2.46 | length 732.2
  Top Layer w8: R17.1@2929.45,3559.45 2965.55,3559.45 3050,3475 3050,3396.08 U2.43@3074.73,3371.36 3100,3346.08 ; U2.46@3032.97,3329.6 3057.56,3305 3075,3305 3100,3330 3100,3346.08 ; U2.21@3353.11,3176.48 3289.6,3240 3240,3240 3133.92,3346.08 3100,3346.08
SWIM_PU: R4.2 U2.4 | length 450.8
  Top Layer w8: R4.2@2765.55,3400.55 2765.55,3334.45 2855,3245 2855,3225 2935.13,3144.87 3015.28,3144.87 U2.4@3046.89,3176.48
SWIM_RST: R19.2 R22.1 U2.42 | length 282.4
  Top Layer w8: R19.2@3030.55,3559.45 3019.45,3548.34 3019.45,3526.77 3065,3481.21 3065,3408.92 U2.42@3088.64,3385.27
  Top Layer w10: R19.2@3034.45,3555.55 R22.1@3109.45,3555.55
SWIM_RST_IN: R19.1 U2.41 | length 135.1
  Top Layer w8: R19.1@3069.45,3520.55 3080,3510 3080,3421.76 U2.41@3102.56,3399.19
T_JTCK: R8.2 U2.15 U2.26 | length 953.9
  Top Layer w8: U2.15@3269.6,3092.97 3322.56,3040 3650,3040 3680,3070 3680,3167.5 R8.2@3652.5,3195 ; U2.26@3380.95,3315.68 3359.48,3294.2 3359.48,3276.52 3370,3266 3509,3266 3575,3200 R8.2@3652.5,3200
T_JTDI: U2.17
T_JTDO: U2.16
T_JTMS: R5.2 R24.2 U2.27 | length 330
  Top Layer w7: U2.27@3367.03,3329.6 3417.88,3380.45 R24.2@3419.55,3380.45 ; 3433.35,3390 3500,3390 3590,3300 R5.2@3652.5,3300
T_NRST: R13.2 U2.18 | length 388.7
  Top Layer w8: U2.18@3311.36,3134.73 3386.08,3060 3590,3060 3630,3100 R13.2@3652.5,3100
T_SWDIO_IN: R24.1 U2.25 | length 80.1
  Top Layer w7: U2.25@3394.87,3301.76 3418.11,3325 3441.89,3325 R24.1@3458.45,3341.55
T_SWO: U2.31
TEM_AD: R205.2 RT201.2 SB200.2 SB202_1.2 | length 1049.5
  Top Layer w15: SB202_1.2@2851.17,2155.46 2873.17,2133.46 v2(2873.17,1970.46)
  Top Layer w25: SB200.2@2866.17,1555.46 2928.17,1555.46 v2(2968.17,1595.46) 3053.17,1680.46 R205.2@3108.17,1680.46 3108.17,1665.46 RT201.2@3188.17,1585.46 ; v2(2873.17,1970.46) v2@2878.17,1970.46
  Bottom Layer w25: v2(2873.17,1970.46) 2873.17,1750.46 2973.17,1650.46 2973.17,1590.46 v2(2968.17,1595.46)
TX0: P101.8 P104.2 P602.2 P603.8 | length 787.1
  Bottom Layer w10: P603.8@1375,820 1680,820 P602.2@1725,775 ; P101.8@2700,790 2745,790 2775,760 2775,640 2800,615 2905,615 P104.2@2955,565
TX1: P102.8 P105.2 P801.8 SB804.2 | length 796.1
  Top Layer w10: P801.8@88,777 SB804.2@180,777
  Bottom Layer w15: P105.2@3665,245 3760,340 3830,340 3875,385 3875,715 P102.8@3800,790
TXD: CN602.2 LD1.2 LD601.2 P602.4 U601.4 U601_1.4 | length 1858.7
  Top Layer w10: LD1.2@175,3800 230,3800 240,3790 240,3650 330,3560 330,3480 ; U601_1.4@416.06,3338.39 351.61,3338.39 330,3360 330,3480 ; CN602.2@662.1,3660 662.1,3627.1 632.5,3597.5 592.5,3597.5 530,3535 385,3535 330,3480 ; LD601.2@1525,1150 1525,820 1570,775 P602.4@1625,775 1685,715 1775,715 1851.61,638.39 U601.4@1921.06,638.39
U5V: C2.2 C5.2 CN1.1 U1.1 U1.3 | length 426
  Top Layer w16: CN1.1@3321.12,3733.14 3321.12,3683.88 3335,3670 3392.5,3670
  Top Layer w20: C2.2@3410,3677.5 C5.2@3460,3677.5 3477.5,3677.5 3490,3690 U1.1@3540,3690 3580,3690 3595,3675 3595,3635 3575.2,3615.2 U1.3@3540,3615.2
USB_DM: CN1.2 U2.32 | length 386.6
  Top Layer w7: CN1.2@3295.53,3733.14 CN1.2@3297.8,3730.87
  Top Layer w8: U2.32@3297.44,3399.19 3360,3461.76 3360,3565 3297.8,3627.2 CN1.2@3297.8,3730.87
USB_DP: CN1.3 R16.1 U2.33 | length 398.3
  Top Layer w8: R16.1@3265,3595 R16.1@3270,3600 ; CN1.3@3269.94,3733.14 3270,3733.08 R16.1@3270,3600 ; U2.33@3283.52,3413.11 3345,3474.6 3345,3550 3295,3600 R16.1@3270,3600
USB_RENUMN: U2.38
VBAT: 
pads on no net: CN4.6 CN101.4 CN601.4 CN601_1.MH1 CN601_1.MH2 CN801.2 CN801.3 CN801.4 P101.2 P101.3 P101.4 P101.5 P101.6 P101.7 P101.10 P101.11 P101.12 P102.2 P102.3 P102.4 P102.5 P102.10 P102.11 P102.12 P103.3 P103.4 P103.6 P201_1.2 P201_1.3 P201_1.4 P201_1.5 P201_1.6 P201_1.7 P201_1.8 P201_1.9 P201_1.10 P201_1.11 P201_1.12 P202.12 P202_1.6 P202_1.7 P202_1.8 P202_1.9 P202_1.12 P203.6 P203_1.3 P203_1.4 P203_1.6 P401.6 P401.7 P401.8 P401.9 P402.4 P402.5 P402.6 P402.7 P402.8 P402.9 P402.10 P402.11 P402.12 P403.3 P403.4 P403.6 P600.1 P600.2 P601.3 P601.4 P601.6 P603.2 P603.3 P603.4 P603.5 P603.10 P603.11 P603.12 P802.3 P802.12 P803.6 S601.0 S601.MH1 S601.MH2 S801.0 S801.MH1 S801.MH2 U2.11 U2.12 U2.13 U2.14 U2.19 U2.28 U2.29 U2.39 U2.40 U101.10 U101.11 U101.12 U101.13 U101.15 U102.4 U102_1.4 U601.2 U601.5 U601.14 U601.17 U601.18 U601_1.2 U601_1.5 U601_1.14 U601_1.17 U601_1.18

## Polygon pours and split planes (outlines as drawn)
GND on Bottom Layer "Top Layer-No Net" (solid, remove dead copper, pour order 23): 2630,1300 3875,1300 3880,1295 3895,1280 3895,40 2625,40 2620,45
GND on Bottom Layer "Top Layer-No Net" (solid, remove dead copper, pour order 26): 1300,1315 2580,1315 2585,1310 2585,35 1305,35
GND on Bottom Layer "Top Layer-GND" (solid, remove dead copper, pour order 27): 8,12 13,17 1273,17 1273,1292 1278,1297 8,1297
GND on Bottom Layer "Top Layer-GND" (solid, remove dead copper, pour order 22): 1306.83,2624.54 1316.83,2614.54 1666.83,2614.54 1666.83,2004.54 2191.83,2004.54 2191.83,2614.54 2586.83,2614.54 2586.83,1349.54 2596.83,1339.54 2586.83,1329.54 1311.83,1329.54
GND on Bottom Layer "Top Layer-No Net" (solid, remove dead copper, pour order 32): 1323.17,3910.46 1533.17,3910.46 1543.17,3900.46 1548.17,3895.46 1548.17,3650.46 2328.17,3650.46 2338.17,3660.46 2343.17,3665.46 2343.17,3895.46 2563.17,3895.46 2568.17,3900.46 2573.17,3895.46 2573.17,2645.46 1318.17,2645.46 1313.17,2650.46
GND on Bottom Layer "Top Layer-GND" (solid, remove dead copper, pour order 18): 1280,2650 1290,2660 1290,3905 15,3905 5,3915 5,2650
GND on Bottom Layer "Top Layer-GND" (solid, remove dead copper, pour order 20): 2635,3915 3875,3915 3875,2654.96 3870,2649.98 3865,2645 2635,2645
GND on Top Layer "Top Layer-No Net" (solid, remove dead copper, pour order 30): 2635,1295 3875,1295 3895,1275 3895,45 2625,45 2620,40
GND on Top Layer "Top Layer-GND" (solid, remove dead copper, pour order 24): 1310,35 1315,30 2590,30 2590,1310 2580,1320 2575,1315 1300,1315
GND on Top Layer "Top Layer-GND" (solid, remove dead copper, pour order 25): 8,1292 13,1297 1278,1297 1278,22 1273,17 1268,12 3,12 8,12
GND on Top Layer "Top Layer-GND" (solid, remove dead copper, pour order 21): 1306.83,2624.54 1311.83,2619.54 1606.83,2619.54 1661.83,2619.54 1666.83,2614.54 1651.83,2599.54 1651.83,1999.54 2186.83,1999.54 2191.83,2004.54 2196.83,2009.54 2196.83,2614.54 2591.83,2614.54 2591.83,1334.54 1311.83,1334.54 1306.83,1339.54
GND on Top Layer "Top Layer-No Net" (solid, remove dead copper, pour order 31): 1318.17,3905.46 1323.17,3900.46 1543.17,3900.46 1543.17,3660.46 1548.17,3655.46 2343.17,3655.46 2343.17,3880.46 2353.17,3890.46 2358.17,3895.46 2568.17,3895.46 2568.17,2660.46 2573.17,2655.46 2563.17,2645.46 1318.17,2645.46
GND on Top Layer "Top Layer-GND" (solid, remove dead copper, pour order 17): 5,3900.04 9.98,3905 1285,3905 1285,2654.96 1280.02,2650 14.96,2650
GND on Top Layer "Top Layer-GND" (solid, remove dead copper, pour order 19): 2644.8,3915 2635,3905.08 2635,2645 3870.1,2645 3875,2649.96 3875,3915

## Keep-outs
Keep-Out Layer:
  lines w10: -12,7 -2,-3 ; -10,20 -10,3925 3915,3925 3915,10 ; 0,0 3905,0

## Silkscreen, mask and mechanical layers (free items; w line width, h text height)
Top Overlay:
  rectangle: 1543.17,2785.46 2343.17,3651.6
  lines w10: -10,2625 -10,3925 1290,3925 ; -7,2 1293,2 ; -7,1307 1293,1307 1293,7 ; -5,1320 1295,1320 ; -2,-3 -2,1297 ; 43.83,1439.54 ccw(c98.83,1491.54) 150.83,1436.54 ; 184.28,50.58 ccw(c239.28,102.58) 291.28,47.58 ; 992,2675 ccw(c1047,2727) 1099,2672 ; 1290,25 1290,1325 ; 1293.17,2625.46 1293.17,3925.46 ; 1295,2620 1295,1320 ; 1295,3925 1295,2625 ; 1296.83,1329.54 1296.83,2629.54 ; 1298.17,2625.46 2598.17,2625.46 ; 1298.17,3915.46 2598.17,3915.46 ; 1300,1320 2600,1320 ; 1300,1325 2600,1325 2600,25 ; 1300,3925 1300,2625 2600,2625 2600,3925 ; 1301.83,1329.54 2601.83,1329.54 2601.83,2629.54 ; 1301.83,2634.54 2601.83,2634.54 ; 1472,75 ccw(c1527,127) 1579,72 ; 1485.17,2675.46 ccw(c1540.17,2727.46) 1592.17,2672.46 ; 1488.83,1389.54 ccw(c1543.83,1441.54) 1595.83,1386.54 ; 1585,960 1760,960 ; 1795,915 1795,840 1835,800 1835,730 ; 2595,20 1295,20 1295,1320 ; 2598.17,1320.46 3898.17,1320.46 ; 2598.17,1325.46 2598.17,2625.46 ; 2598.17,3925.46 2598.17,2625.46 ; 2600,20 2600,1320 ; 2600,2620 2600,1320 ; 2605,20 2605,1320 ; 2610,2625 3910,2625 ; 2620,3910 2620,2630 3900,2630 3900,3910 ; 2793.34,65 ccw(c2848.34,117) 2900.34,62 ; 2902,2705 ccw(c2957,2757) 3009,2702 ; 3604.17,2578.46 cw(c3656.17,2523.46) 3711.17,2575.46 ; 3898.17,1325.46 3898.17,2625.46 2598.17,2625.46 ; 3910,20 3910,1320 ; 1295,2625 -5,2625 1295,2625 ; 3910,1320 2610,1320 3910,1320
  text "UART" at 115,3860 h39.37
  text "RX" at 90,3725 h40 r90
  text "TX" at 254.71,3714.43 h40 r90
  text "H" at 2640,3713 h80
  text "N" at 3042,3666 h80
  text "PWR" at 1200,3660 h40 r90
  text "PWR-SWD" at 3365,3550 h40
  text "PWR-SWIM" at 3385,2925 h40
  text "SWIM" at 2650,2920 h40 r270
  text "IAPer" at 960,2855 h39.37
  text "SWD" at 3845,2825 h40 r90
  text "USB" at 235,2815 h39.37
  text "Rev.A1" at 965,2795 h39.37
  text "ST-LINK-Wiki" at 3075,2755 h50
  text "Wikiot-CC2530-SZ" at 1658.17,2745.46 h33.46
  text "i i" at 2891,2738 h60
  text "W" at 2929,2715 h80
  text "i i" at 981,2708 h60
  text "i i" at 1474.17,2708.46 h60
  text "N" at 190,2690 h80
  text "W" at 1019,2685 h80
  text "W" at 1512.17,2685.46 h80
  text "Rev.A2" at 3075,2680 h39.37
  text "GND" at 3675,2680 h40
  text "A2" at 2303.17,2675.46 h39.37
  text "GND" at 2735,2675 h40
  text "A1" at 2878.17,2575.46 h39.37 r180
  text "W" at 3684.17,2565.46 h80 r180
  text "i i" at 3722.17,2542.46 h60 r180
  text "Wikiot-Sensor" at 3458.17,2480.46 h33.46 r180
  text "i i" at 32.83,1472.54 h60
  text "Wikiot-nRF24L01-MINI" at 1641.83,1469.54 h33.46
  text "W" at 70.83,1449.54 h80
  text "i i" at 1477.83,1422.54 h60
  text "A1" at 1116.83,1419.54 h39.37
  text "W" at 1515.83,1399.54 h80
  text "A1" at 2326.83,1384.54 h39.37
  text "Pwr" at 3565,1260 h40
  text "T" at 1510,1255 h40
  text "R" at 1560,1255 h40
  text "Pwr" at 1655,1255 h40
  text "R" at 2780,1235 h40
  text "T" at 2825,1235 h40
  text "RXD" at 1455,895 h40
  text "TXD" at 1450,795 h40
  text "SCL" at 1455,700 h40
  text "SDA" at 1455,595 h40
  text "Wikiot-Power&CH341T" at 1645,155 h33.46
  text "Wikiot-Power&CH340G" at 2940,155 h33.46
  text "Wikiot-STM32F0" at 398,137 h33.46
  text "i i" at 1461,108 h60
  text "i i" at 2782.34,98 h60
  text "W" at 1499,85 h80
  text "i i" at 173.28,83.58 h60
  text "W" at 2820.34,75 h80
  text "Rev.A2" at 2260,70 h39.37
  text "A1" at 3625,70 h39.37
  text "W" at 211.28,60.58 h80
  text "A2" at 1003,57 h39.37
Bottom Overlay:
  text "H" at 2428.17,3688.46 h80
  text "N" at 2026.17,3641.46 h80
  text "VDD" at 3720,3475 h40
  text "GND" at 3725,3390 h40
  text "SWIO" at 3735,3285 h40
  text "SWIM_RST" at 3040,3270 h40
  text "SWCLK" at 3735,3185 h40
  text "SWIM" at 2880,3180 h40
  text "NRST" at 3735,3085 h40
  text "GND" at 2850,3080 h40
  text "VDD" at 2840,2980 h40
  text "H" at 2371.83,2402.54 h80
  text "N" at 1969.83,2355.54 h80
  text "N" at 3118.17,1560.46 h80 r180
  text "H" at 2768.17,1505.46 h80 r180
  text "H" at 2455,1103 h80
  text "H" at 3748.56,1088 h80
  text "H" at 568,1072 h80
  text "N" at 2113,1056 h80
  text "N" at 3346.56,1041 h80
  text "N" at 208,1032 h80